# EAGLE board igep-lcd (EAGLE 6.1)
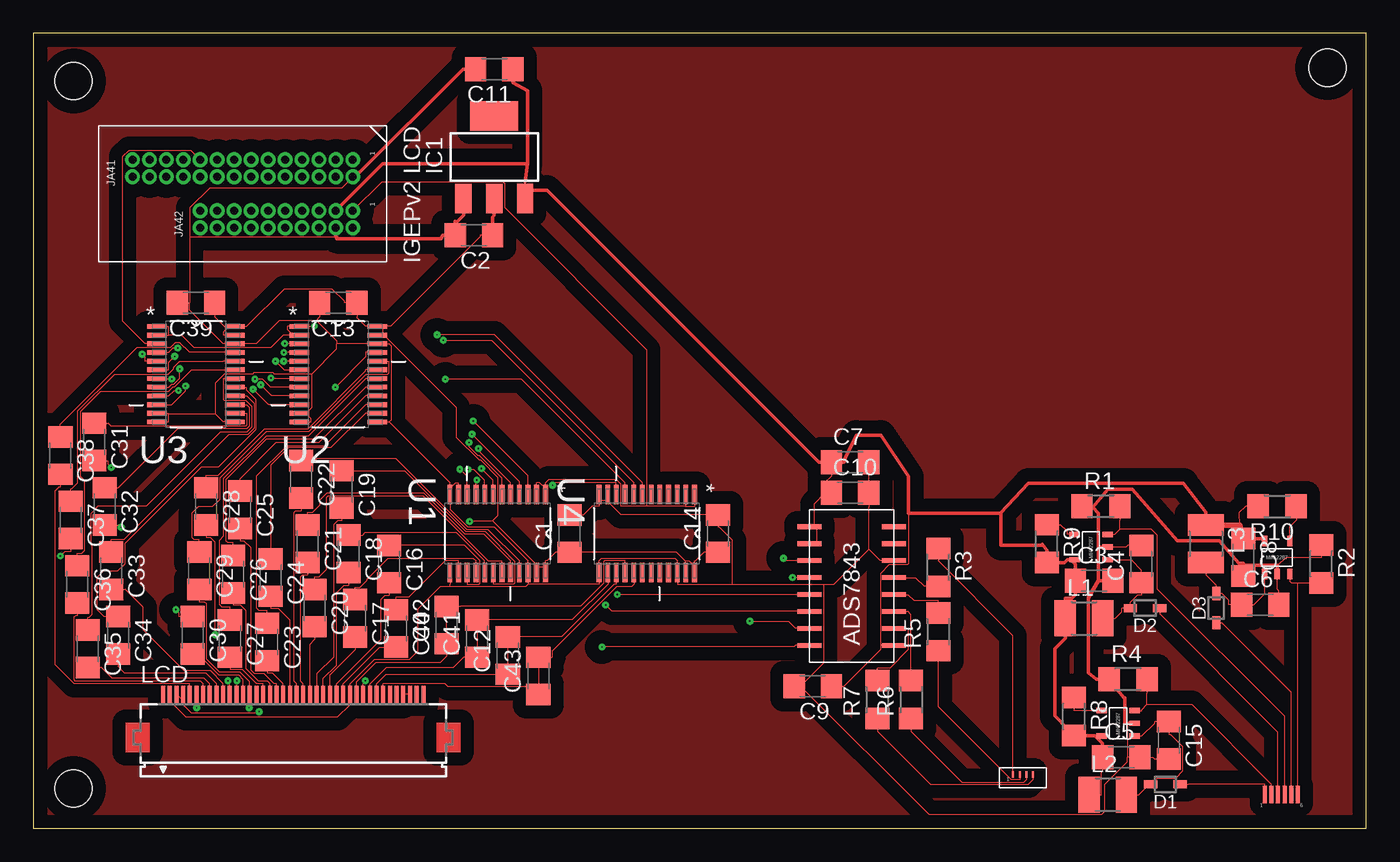
[diagram p0: board, top side]
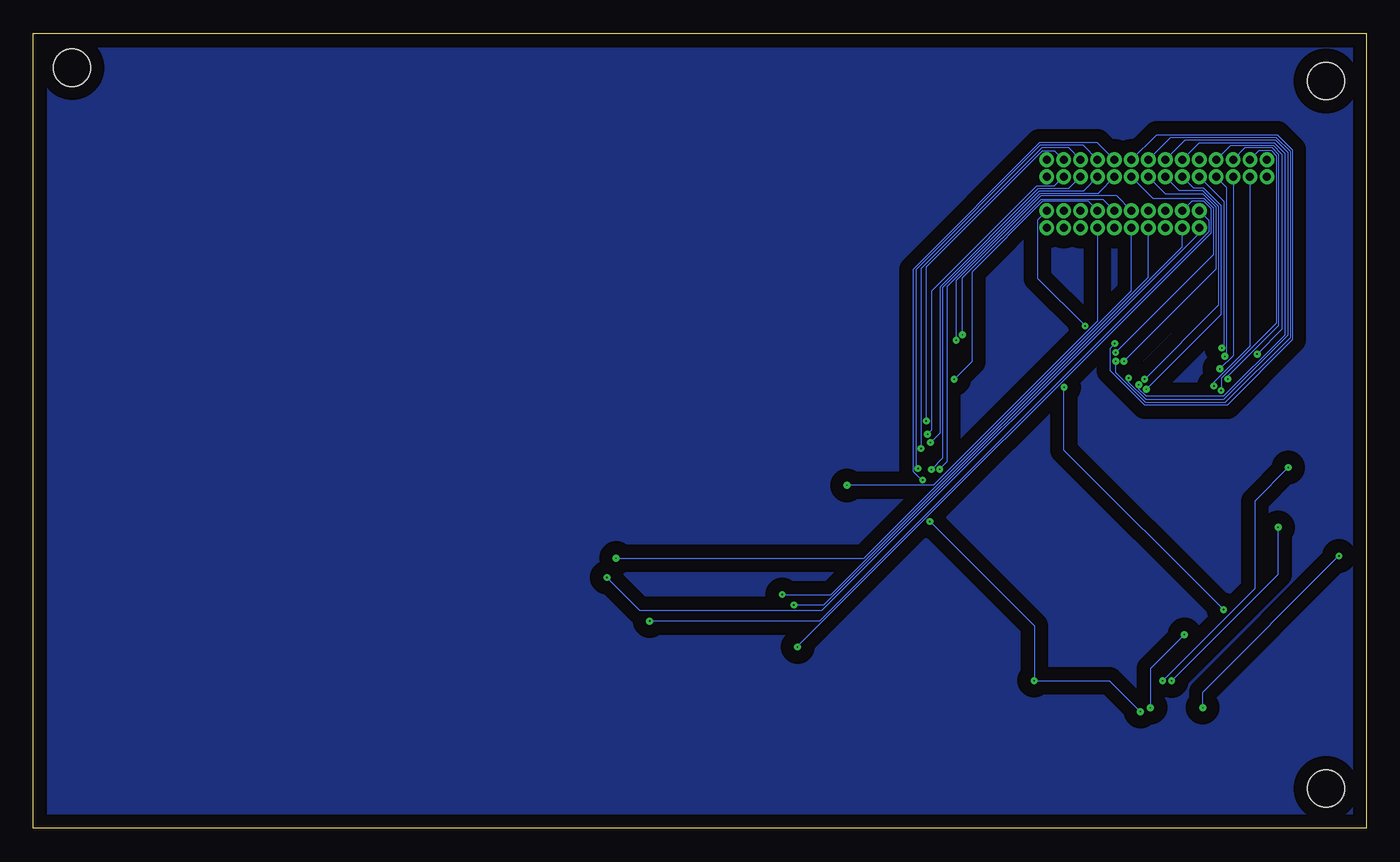
[diagram p1: board, bottom side, seen from below]

Size 99.89 x 59.57 mm. Coordinates in mm from the lower left corner, seen from the top.
Outline: 0,0 99.89,0 99.89,59.57 0,59.57 0,0
Copper layers (1*16): Top 0.035mm / dielectric 1.5mm / Bottom 0.035mm
Design rules: minimum track width 3mil, minimum drill 4mil, track to track 4mil, track to pad 4mil, pad to pad 4mil, via to via 4mil, smd to smd 4mil, copper to edge 40mil, drill to drill 4mil, minimum pad ring 10mil, minimum via ring 8mil, stop-mask expansion 4mil, vias tented up to drill 0mil, thermal gap 10mil
Holes 2.8 mm at 97,57 3,3 3,56

## Footprints (pad centres in the part's own frame; a part is rotated, then mirrored left to right if it is on the bottom)
C1206 = smd 1.6 x 1.8: 1 -1.4,0; 2 1.4,0
SOD323 = smd 1 x 0.6: 1 -1.1,0; 2 1.1,0
SOT223 = smd 1.219 x 2.235: 1 -2.311,-3.099; 2 0,-3.099; 3 2.311,-3.099 | smd 3.6 x 2.2: TAB 0,3.099
R1210 = smd 1.6 x 2.7: 1 -1.4,0; 2 1.4,0
FH12-40S-0.5SH = smd 0.3 x 1.3: 1 -9.75,3.25; 2 -9.25,3.25; 3 -8.75,3.25; 4 -8.25,3.25; 5 -7.75,3.25; 6 -7.25,3.25; 7 -6.75,3.25; 8 -6.25,3.25; 9 -5.75,3.25; 10 -5.25,3.25; 11 -4.75,3.25; 12 -4.25,3.25; 13 -3.75,3.25; 14 -3.25,3.25; 15 -2.75,3.25; 16 -2.25,3.25; 17 -1.75,3.25; 18 -1.25,3.25; 19 -0.75,3.25; 20 -0.25,3.25; 21 0.25,3.25; 22 0.75,3.25; 23 1.25,3.25; 24 1.75,3.25; 25 2.25,3.25; 26 2.75,3.25; 27 3.25,3.25; 28 3.75,3.25; 29 4.25,3.25; 30 4.75,3.25; 31 5.25,3.25; 32 5.75,3.25; 33 6.25,3.25; 34 6.75,3.25; 35 7.25,3.25; 36 7.75,3.25; 37 8.25,3.25; 38 8.75,3.25; 39 9.25,3.25; 40 9.75,3.25
R1206 = smd 1.6 x 1.803: 1 -1.422,0; 2 1.422,0
SOP65P640X120-24N = smd 1.473 x 0.356: 1 -2.921,3.581; 2 -2.921,2.921; 3 -2.921,2.286; 4 -2.921,1.626; 5 -2.921,0.965; 6 -2.921,0.33; 7 -2.921,-0.33; 8 -2.921,-0.965; 9 -2.921,-1.626; 10 -2.921,-2.286; 11 -2.921,-2.921; 12 -2.921,-3.581; 13 2.921,-3.581; 14 2.921,-2.921; 15 2.921,-2.286; 16 2.921,-1.626; 17 2.921,-0.965; 18 2.921,-0.33; 19 2.921,0.33; 20 2.921,0.965; 21 2.921,1.626; 22 2.921,2.286; 23 2.921,2.921; 24 2.921,3.581
IGEP_LCD = drill 0.6: 3V3 -2.54,5.08; ACBIAS 1.27,0; D0 -2.54,3.81; D1 -1.27,3.81; D2 -2.54,2.54; D3 -1.27,2.54; D4 -2.54,1.27; D5 -1.27,1.27; D6 -2.54,0; D7 -1.27,0; D8 -2.54,-1.27; D9 -1.27,-1.27; D10 -2.54,-2.54; D11 -1.27,-2.54; D12 -2.54,-3.81; D13 -1.27,-3.81; D14 -2.54,-5.08; D15 -1.27,-5.08; D16 -2.54,-6.35; D17 -1.27,-6.35; D18 -2.54,-7.62; D19 -1.27,-7.62; D20 -2.54,-8.89; D21 -1.27,-8.89; D22 -2.54,-10.16; D23 -1.27,-10.16; DC_5V 1.27,3.81; GND1 -1.27,5.08; GND2 2.54,3.81; HSYNC 2.54,1.27; I2C3_SCL -2.54,-11.43; I2C3_SDA -1.27,-11.43; LCD_INI 2.54,-3.81; LCD_RESB 1.27,-3.81; MCSPI1_CLK 1.27,-5.08; MCSPI1_CS0 1.27,-6.35; MCSPI1_SIMO 2.54,-5.08; MCSPI1_SOMI 2.54,-6.35; PCLK 1.27,-1.27; PUP 2.54,0; QVGA/NVGA 1.27,-2.54; SYS_BOOT0 1.27,2.54; SYS_BOOT1 2.54,2.54; SYS_BOOT5 2.54,5.08; TS_ENVVDD 2.54,-2.54; TS_NPEN_IRQ 2.54,-1.27; VIO_1V8 1.27,5.08; VSYNC 1.27,1.27
MIC2287 = smd 0.4 x 0.8: EN -0.7,-1.98; FB -0.7,0.5; GND 0.25,0.5; SW 1.2,0.5; VIN 1.2,-1.98
LCD_BL = smd 0.3 x 1.3: VLED_A1 -1.54,0; VLED_A2 -0.54,0; VLED_A3 0.46,0; VLED_C1 -1.04,0; VLED_C2 -0.04,0; VLED_C3 0.96,0
ADS7843 = smd 0.35 x 1.8: P1 -3.81,-3.81; P2 -2.54,-3.81; P3 -1.27,-3.81; P4 0,-3.81; P5 1.27,-3.81; P6 2.54,-3.81; P7 3.81,-3.81; P8 5.08,-3.81; P9 5.08,2.54; P10 3.81,2.54; P11 2.54,2.54; P12 1.27,2.54; P13 0,2.54; P14 -1.27,2.54; P15 -2.54,2.54; P16 -3.81,2.54
TS_CON = smd 0.15 x 0.5: TS1 -1,0.5; TS2 -0.5,0.5; TS3 0,0.5; TS4 0.5,0.5

## Placement (x,y rotation side)
C1  100nF  [C1206]  40.18,22.1 90 top
C2  22uF  [C1206]  33.02,44.45 180 top
C3  1uF  [C1206]  79.5,18.54 0 top
C4  0.22uF  [C1206]  83.06,19.81 90 top
C5  1uF  [C1206]  81.53,5.33 0 top
C6  0.22uF  [C1206]  91.95,16.76 0 top
C7  10uF  [C1206]  61.21,27.43 0 top
C8  1uF  [C1206]  90.68,20.32 270 top
C9  0.1uF  [C1206]  58.42,10.67 180 top
C10  0.1uF  [C1206]  61.21,25.15 0 top
C11  10uF  [C1206]  34.54,56.9 180 top
C12  100nF  [C1206]  35.56,12.95 90 top
C13  100nF  [C1206]  22.86,39.37 180 top
C14  100nF  [C1206]  51.31,22.1 90 top
C15  0.22uF  [C1206]  85.09,6.6 270 top
C16  100nF  [C1206]  26.67,19.81 270 top
C17  100nF  [C1206]  24.13,15.75 270 top
C18  100nF  [C1206]  23.62,20.57 270 top
C19  100nF  [C1206]  23.11,25.4 270 top
C20  100nF  [C1206]  21.08,16.51 270 top
C21  100nF  [C1206]  20.57,21.34 270 top
C22  100nF  [C1206]  20.07,26.16 270 top
C23  100nF  [C1206]  17.53,13.97 270 top
C24  100nF  [C1206]  17.78,18.8 270 top
C25  100nF  [C1206]  15.49,23.88 270 top
C26  100nF  [C1206]  14.99,19.05 270 top
C27  100nF  [C1206]  14.73,14.22 270 top
C28  100nF  [C1206]  12.95,24.13 270 top
C29  100nF  [C1206]  12.45,19.3 270 top
C30  100nF  [C1206]  11.94,14.48 270 top
C31  100nF  [C1206]  4.57,28.96 270 top
C32  100nF  [C1206]  5.33,24.13 270 top
C33  100nF  [C1206]  5.84,19.3 270 top
C34  100nF  [C1206]  6.35,14.48 270 top
C35  100nF  [C1206]  4.06,13.46 270 top
C36  100nF  [C1206]  3.3,18.29 270 top
C37  100nF  [C1206]  2.79,23.11 270 top
C38  100nF  [C1206]  2.03,27.94 270 top
C39  100nF  [C1206]  12.19,39.37 180 top
C40  100nF  [C1206]  27.18,14.99 270 top
C41  100nF  [C1206]  33.27,14.22 90 top
C42  100nF  [C1206]  30.99,15.24 90 top
C43  100nF  [C1206]  37.85,11.43 90 top
D1  CMDSH-3  [SOD323]  84.84,3.3 180 top
D2  CMDSH-3  [SOD323]  83.31,16.51 180 top
D3  CMDSH-3  [SOD323]  88.65,16.51 90 top
IC1  LM1117IMPX-3.3  [SOT223]  34.54,50.29 0 top
L1  10uH  [R1210]  78.74,15.75 0 top
L2  10uH  [R1210]  80.52,2.54 0 top
L3  10uH  [R1210]  87.88,21.34 270 top
LCD  FH12-40S-0.5SH  [FH12-40S-0.5SH]  19.48,6.81 0 top
R1  5.1  [R1206]  80.01,24.13 0 top
R2  5.1  [R1206]  96.52,19.81 270 top
R3  0  [R1206]  67.82,19.56 270 top
R4  5.1  [R1206]  82.04,11.18 0 top
R5  0  [R1206]  67.82,14.73 90 top
R6  0  [R1206]  65.79,9.65 90 top
R7  0  [R1206]  63.25,9.65 90 top
R8  0  [R1206]  77.98,8.38 270 top
R9  0  [R1206]  75.95,21.34 270 top
R10  0  [R1206]  93.22,24.13 180 top
U1  SN74LVC8T245PW  [SOP65P640X120-24N]  34.8,22.1 270 top
U2  SN74LVC8T245PW  [SOP65P640X120-24N]  22.86,34.04 0 top
U3  SN74LVC8T245PW  [SOP65P640X120-24N]  12.19,34.04 0 top
U4  SN74LVC8T245PW  [SOP65P640X120-24N]  45.97,22.1 270 top
U$1  IGEP_LCD  [IGEP_LCD]  18.86,47.55 270 top
U$2  MIC2287  [MIC2287]  82.04,8.13 270 top
U$3  MIC2287  [MIC2287]  80.01,21.34 270 top
U$4  MIC2287  [MIC2287]  93.47,19.56 180 top
U$5  LCD_BL  [LCD_BL]  93.82,2.54 0 top
U$6  ADS7843  [ADS7843]  60.71,17.53 90 top
U$7  TS_CON  [TS_CON]  74.42,3.54 0 top

## Library data of the parts
C1-C43 R1-R10 = rcl
D1-D3 = zetex; MPN: CDSOD323-T05C; OC_FARNELL: 1824860; OC_NEWARK: 79R6078
IC1 = lm1117
L1-L3 = resistor
LCD = con-hirose; MPN: FH12-40S-0.5SH(55); OC_FARNELL: 1324556; OC_NEWARK: 34M6178
U1-U4 = TI-SN74LVC8T245PW; DESCRIPTION: 8-BIT DUAL-SUPPLY BUS TRANSCEIVER WITH CONFIGURABLE VOLTAGE TRANSLATION AND 3-STATE OUTPUTS; MPN: SN74LVC8T245PW; OC_FARNELL: 1236407; OC_NEWARK: 58K6537; PACKAGE: TSSOP-24; SUPPLIER: Texas Instruments
U$1 = igep-lcd
U$2-U$4 = mic2287
U$5 = lcd-bl
U$6 = ads7843
U$7 = ts_con

## Nets
DEN: U4.7 U$1.ACBIAS
HSYNC\: U4.10 U$1.HSYNC
IGEP_LCD_DATA0: U1.3 U$1.D0
IGEP_LCD_DATA1: U1.4 U$1.D1
IGEP_LCD_DATA2: U1.5 U$1.D2
IGEP_LCD_DATA3: U1.6 U$1.D3
IGEP_LCD_DATA4: U1.7 U$1.D4
IGEP_LCD_DATA5: U1.8 U$1.D5
IGEP_LCD_DATA6: U1.9 U$1.D6
IGEP_LCD_DATA7: U1.10 U$1.D7
IGEP_LCD_DATA8: U2.3 U$1.D8
IGEP_LCD_DATA9: U2.4 U$1.D9
IGEP_LCD_DATA10: U2.5 U$1.D10
IGEP_LCD_DATA11: U2.6 U$1.D11
IGEP_LCD_DATA12: U2.7 U$1.D12
IGEP_LCD_DATA13: U2.8 U$1.D13
IGEP_LCD_DATA14: U2.9 U$1.D14
IGEP_LCD_DATA15: U2.10 U$1.D15
IGEP_LCD_DATA16: U3.3 U$1.D16
IGEP_LCD_DATA17: U3.4 U$1.D17
IGEP_LCD_DATA18: U3.5 U$1.D18
IGEP_LCD_DATA19: U3.6 U$1.D19
IGEP_LCD_DATA20: U3.7 U$1.D20
IGEP_LCD_DATA21: U3.8 U$1.D21
IGEP_LCD_DATA22: U3.9 U$1.D22
IGEP_LCD_DATA23: U3.10 U$1.D23
LCD_DATA0: C22.2 LCD.21
LCD_DATA1: C21.2 LCD.22
LCD_DATA2: C20.2 LCD.23
LCD_DATA3: C19.2 LCD.24
LCD_DATA4: C18.2 LCD.25
LCD_DATA5: C17.2 LCD.26
LCD_DATA6: C16.2 LCD.27
LCD_DATA7: C40.2 LCD.28
LCD_DATA8: C30.2 LCD.13
LCD_DATA9: C29.2 LCD.14
LCD_DATA10: C28.2 LCD.15
LCD_DATA11: C27.2 LCD.16
LCD_DATA12: C26.2 LCD.17
LCD_DATA13: C25.2 LCD.18
LCD_DATA14: C23.2 LCD.19
LCD_DATA15: C24.2 LCD.20
LCD_DATA16: C38.2 LCD.5
LCD_DATA17: C37.2 LCD.6
LCD_DATA18: C36.2 LCD.7
LCD_DATA19: C35.2 LCD.8
LCD_DATA20: C34.2 LCD.9
LCD_DATA21: C33.2 LCD.10
LCD_DATA22: C32.2 LCD.11
LCD_DATA23: C31.2 LCD.12
N$1: U$1.MCSPI1_CLK U$6.P16
N$2: C1.2 C2.2 C3.2 C4.2 C5.2 C6.2 C7.2 C8.2 C9.2 C10.2 C11.2 C13.2 C14.2 C15.2 C39.2 IC1.1 LCD.1 LCD.2 LCD.29 LCD.37 LCD.38 R1.1 R2.1 R4.1 U1.11 U1.12 U1.13 U1.22 U2.11 U2.12 U2.13 U2.22 U3.11 U3.12 U3.13 U3.22 U4.11 U4.12 U4.13 U4.22 U$1.GND1 U$1.GND2 U$2.GND U$3.GND U$4.GND U$6.P6
N$3: R7.1 U$7.TS4
N$4: U1.1 U1.2 U2.1 U2.2 U3.1 U3.2 U4.1 U4.2 U$1.VIO_1V8
N$5: C41.1 C41.2 LCD.32 U4.14
N$6: R6.1 U$7.TS3
N$7: U$1.MCSPI1_CS0 U$6.P15
N$8: C15.1 D1.2 L2.2 U$2.SW
N$9: C12.1 C12.2 LCD.33 U4.15
N$10: C42.1 C42.2 LCD.30 U4.16
N$11: C43.1 C43.2 LCD.34 U4.17
N$12: R5.1 U$7.TS2
N$13: D1.1 U$5.VLED_A1
N$14: R4.2 U$2.FB U$5.VLED_C1
N$15: C4.1 D2.2 L1.2 U$3.SW
N$16: D2.1 U$5.VLED_A2
N$17: R1.2 U$3.FB U$5.VLED_C2
N$18: R3.1 U$7.TS1
N$19: R10.1 U$4.EN
N$20: U$1.TS_NPEN_IRQ U$6.P11
N$21: C6.1 D3.2 L3.2 U$4.SW
N$22: D3.1 U$5.VLED_A3
N$23: R2.2 U$4.FB U$5.VLED_C3
N$24: R9.1 U$3.EN
N$25: U$1.TS_ENVVDD U$6.P13
N$26: U$1.MCSPI1_SIMO U$6.P14
N$27: U$1.MCSPI1_SOMI U$6.P12
N$28: R8.1 U$2.EN
N$29: R3.2 U$6.P5
N$30: C38.1 U3.21
N$31: R5.2 U$6.P4
N$32: C37.1 U3.20
N$33: R6.2 U$6.P3
N$34: R7.2 U$6.P2
N$35: C3.1 C5.1 C7.1 C8.1 C9.1 C10.1 C11.1 IC1.3 L1.1 L2.1 L3.1 R8.2 R9.2 R10.2 U$1.DC_5V U$2.VIN U$3.VIN U$4.VIN U$6.P1 U$6.P9 U$6.P10
N$36: C1.1 C2.1 C13.1 C14.1 C39.1 IC1.2 LCD.3 LCD.4 LCD.31 U1.23 U1.24 U2.23 U2.24 U3.23 U3.24 U4.23 U4.24
N$37: C36.1 U3.19
N$38: C35.1 U3.18
N$39: C34.1 U3.17
N$40: C33.1 U3.16
N$41: C32.1 U3.15
N$42: C31.1 U3.14
N$43: C30.1 U2.21
N$44: C29.1 U2.20
N$45: C28.1 U2.19
N$46: C27.1 U2.18
N$47: C26.1 U2.17
N$48: C25.1 U2.16
N$49: C23.1 U2.15
N$50: C24.1 U2.14
N$51: C22.1 U1.21
N$52: C21.1 U1.20
N$53: C20.1 U1.19
N$54: C19.1 U1.18
N$55: C18.1 U1.17
N$56: C17.1 U1.16
N$57: C16.1 U1.15
N$58: C40.1 U1.14
PCLK: U4.8 U$1.PCLK
VSYNC: U4.9 U$1.VSYNC

## Tracks (layer width: path | path; a pad name or v marks a point on that pad's centre or on a via)
DEN  (via drill 0.1 pad 0.51)
  Top 0.076: U4.7 45.64,25.89 34.55,36.99 v30.26,36.99
  Bottom 0.076: v30.26,36.99 30.26,41.26 24.36,47.16 19.74,47.16 U$1.ACBIAS
HSYNC\  (via drill 0.1 pad 0.51)
  Top 0.076: v38.91,25.71 39.1,25.89 43.69,25.89 U4.10
  Bottom 0.076: U$1.HSYNC 20.13,38.02 32.44,25.71 v38.91,25.71
IGEP_LCD_DATA0  (via drill 0.1 pad 0.51)
  Top 0.076: U1.3 37.08,26.41 v32.96,30.54
  Bottom 0.076: v32.96,30.54 32.96,42.09 24.26,50.79 23.37,50.79 U$1.D0
IGEP_LCD_DATA1  (via drill 0.1 pad 0.51)
  Top 0.076: U1.4 36.42,25.98 v32.87,29.53
  Bottom 0.076: U$1.D1 23.39,48.1 24.72,48.1 32.57,40.25 32.57,29.84 v32.87,29.53
IGEP_LCD_DATA2  (via drill 0.1 pad 0.51)
  Top 0.076: v33.36,28.47 33.36,28.3 35.76,25.89 U1.5
  Bottom 0.076: U$1.D2 22.3,50.99 24.31,50.99 33.36,41.94 v33.36,28.47
IGEP_LCD_DATA3  (via drill 0.1 pad 0.51)
  Top 0.076: U1.6 35.13,26.25 33.45,27.93 33.34,27.93 32.66,28.62 v32.66,28.91
  Bottom 0.076: U$1.D3 22.3,47.92 24.6,47.92 31.96,40.56 31.96,29.61 v32.66,28.91
IGEP_LCD_DATA4  (via drill 0.1 pad 0.51)
  Top 0.076: U1.7 34.47,26.08 v33.59,26.96
  Bottom 0.076: U$1.D4 21.21,51.17 24.44,51.17 33.76,41.85 33.76,27.13 v33.59,26.96
IGEP_LCD_DATA5  (via drill 0.1 pad 0.51)
  Top 0.076: U1.8 33.83,26.07 33.02,26.89 v32.58,26.89
  Bottom 0.076: U$1.D5 21.21,47.75 24.52,47.75 31.75,40.52 31.75,27.72 v32.58,26.89
IGEP_LCD_DATA6  (via drill 0.1 pad 0.51)
  Top 0.076: v33.23,26.11 33.17,26.06 33.17,25.89 U1.9
  Bottom 0.076: U$1.D6 20.15,51.38 24.48,51.38 33.98,41.88 33.98,26.78 33.32,26.11 v33.23,26.11
IGEP_LCD_DATA7  (via drill 0.1 pad 0.51)
  Top 0.076: U1.10 32.51,26.38 v31.97,26.92
  Bottom 0.076: U$1.D7 20.12,47.57 24.45,47.57 31.43,40.59 31.43,27.46 v31.97,26.92
IGEP_LCD_DATA8  (via drill 0.1 pad 0.51)
  Top 0.076: v18.84,36.33 19.06,36.33 19.06,36.32 U2.3
  Bottom 0.076: U$1.D8 15.71,51.98 6.64,51.98 5.52,50.86 5.52,36.62 10.42,31.71 16.59,31.71 19.18,34.31 19.18,35.99 v18.84,36.33
IGEP_LCD_DATA9  (via drill 0.1 pad 0.51)
  Top 0.076: U2.4 v18.77,35.66
  Bottom 0.076: v18.77,35.66 11.42,43.01 11.42,46.47 12.11,47.16 15.93,47.16 U$1.D9
IGEP_LCD_DATA10  (via drill 0.1 pad 0.51)
  Top 0.076: v18.77,35 19.06,35 U2.5
  Bottom 0.076: U$1.D10 14.62,51.8 6.77,51.8 5.7,50.73 5.7,36.77 10.58,31.89 16.52,31.89 18.77,34.15 v18.77,35
IGEP_LCD_DATA11  (via drill 0.1 pad 0.51)
  Top 0.076: v18.15,35 18.79,34.37 U2.6
  Bottom 0.076: v18.15,35 11.22,41.93 11.22,46.52 12.21,47.52 15.02,47.52 U$1.D11
IGEP_LCD_DATA12  (via drill 0.1 pad 0.51)
  Top 0.076: U2.7 17.86,33.71 v17.81,33.75
  Bottom 0.076: U$1.D12 13.54,51.6 6.83,51.6 5.88,50.65 5.88,36.94 10.69,32.12 16.49,32.12 17.81,33.44 v17.81,33.75
IGEP_LCD_DATA13  (via drill 0.1 pad 0.51)
  Top 0.076: v16.6,33.67 17.18,33.67 17.77,33.07 19.06,33.07 U2.8
  Bottom 0.076: v16.6,33.67 11.04,39.23 11.04,46.6 12.23,47.79 14.01,47.79 U$1.D13
IGEP_LCD_DATA14  (via drill 0.1 pad 0.51)
  Top 0.076: v17.04,33.24 17.88,32.41 19.06,32.41 U2.9
  Bottom 0.076: U$1.D14 12.5,51.38 6.9,51.38 6.11,50.58 6.11,36.96 10.69,32.38 16.49,32.38 17.04,32.92 v17.04,33.24
IGEP_LCD_DATA15  (via drill 0.1 pad 0.51)
  Top 0.076: U2.10 17.63,31.75 v16.47,32.91
  Bottom 0.076: v16.47,32.91 10.86,38.52 10.86,46.67 12.15,47.96 12.92,47.96 U$1.D15
IGEP_LCD_DATA16
  Top 0.076: U3.3 8.39,36.32 6.7,38.02 6.7,50.35 7.17,50.82 11.79,50.82 U$1.D16
IGEP_LCD_DATA17  (via drill 0.1 pad 0.51)
  Top 0.076: v10.82,36 10.49,36 10.15,35.66 U3.4 | v10.82,36
  Bottom 0.076: U$1.D17 10.67,46.98 10.67,36.16 v10.82,36
IGEP_LCD_DATA18  (via drill 0.1 pad 0.51)
  Top 0.076: v8.17,35.54 8.39,35.31 8.39,35 U3.5
  Bottom 0.076: U$1.D18 10.14,51.2 6.97,51.2 6.31,50.53 6.31,37.4 v8.17,35.54
IGEP_LCD_DATA19  (via drill 0.1 pad 0.51)
  Top 0.076: U3.6 10.15,34.37 10.15,34.93 v10.59,35.37
  Bottom 0.076: v10.59,35.37 10.43,35.53 10.43,48.01 U$1.D19
IGEP_LCD_DATA20  (via drill 0.1 pad 0.51)
  Top 0.076: U3.7 10.33,33.71 v10.37,33.67
  Bottom 0.076: v10.37,33.67 10.37,33.89 6.55,37.71 6.55,50.49 7.05,50.98 9.08,50.98 U$1.D20
IGEP_LCD_DATA21  (via drill 0.1 pad 0.51)
  Top 0.076: v10.97,34.43 10.97,33.72 10.53,33.28 10.35,33.28 10.15,33.07 U3.8
  Bottom 0.076: U$1.D21 9.97,35.43 v10.97,34.43
IGEP_LCD_DATA22  (via drill 0.1 pad 0.51)
  Top 0.076: v10.87,32.81 10.55,32.81 10.15,32.41 U3.9
  Bottom 0.076: U$1.D22 7.99,50.81 7.12,50.81 6.73,50.41 6.73,37.87 10.87,33.72 v10.87,32.81
IGEP_LCD_DATA23  (via drill 0.1 pad 0.51)
  Top 0.076: U3.10 10.37,31.75 11.41,32.79 v11.41,33.15
  Bottom 0.076: U$1.D23 8.7,36.15 11.41,33.44 v11.41,33.15
LCD_DATA0
  Top 0.076: C22.2 20.07,23.82 19.67,23.82 19.53,23.69 19.53,11.05 19.73,10.85 LCD.21
LCD_DATA1
  Top 0.076: C21.2 20.57,19 20.18,19 20.04,18.86 20.04,11.04 20.23,10.85 LCD.22
LCD_DATA2
  Top 0.076: C20.2 21.08,14.17 20.73,13.82 LCD.23
LCD_DATA3
  Top 0.076: LCD.24 21.23,11.57 22.49,12.84 22.49,22.75 22.8,23.06 23.11,23.06 C19.2
LCD_DATA4
  Top 0.076: C18.2 23.62,18.23 23.28,18.23 22.71,17.67 22.71,12.24 21.73,11.26 LCD.25
LCD_DATA5
  Top 0.076: LCD.26 22.23,11.51 24.13,13.41 C17.2
LCD_DATA6
  Top 0.076: C16.2 26.67,17.47 26.36,17.47 26.05,17.16 26.05,14.17 22.73,10.85 LCD.27
LCD_DATA7
  Top 0.076: LCD.28 23.23,10.85 25.97,13.59 C40.2
LCD_DATA8
  Top 0.076: LCD.13 15.73,11.15 15.42,11.46 13.94,11.46 12.33,13.08 C30.2
LCD_DATA9
  Top 0.076: C29.2 12.45,16.96 12.85,16.96 12.98,16.83 12.98,12.68 13.96,11.7 15.51,11.7 16.23,10.98 16.23,10.85 LCD.14
LCD_DATA10  (via drill 0.1 pad 0.51)
  Top 0.076: v13.62,14.52 13.62,21.46 13.29,21.79 12.95,21.79 C28.2 | v16.17,9.05 16.39,9.27 16.73,9.27 LCD.15
  Bottom 0.076: v13.62,14.52 16.17,11.97 v16.17,9.05
LCD_DATA11
  Top 0.076: C27.2 14.73,11.88 15.7,11.88 16.73,10.85 17.23,10.85 LCD.16
LCD_DATA12
  Top 0.076: C26.2 14.99,16.71 15.55,16.71 15.97,16.3 15.97,11.96 16.9,11.03 17.55,11.03 17.73,10.85 LCD.17
LCD_DATA13
  Top 0.076: C25.2 15.49,21.54 15.8,21.54 16.32,21.02 16.32,11.87 16.59,11.6 17.3,11.6 18.05,10.85 18.23,10.85 LCD.18
LCD_DATA14
  Top 0.076: LCD.19 18.73,10.85 17.95,11.63 17.53,11.63 C23.2
LCD_DATA15
  Top 0.076: C24.2 17.78,16.46 18.37,16.46 19.23,15.59 LCD.20
LCD_DATA16
  Top 0.076: C38.2 2.03,25.6 1.94,25.6 1.64,25.31 1.64,12.28 3.07,10.85 11.73,10.85 LCD.5
LCD_DATA17  (via drill 0.1 pad 0.51)
  Top 0.076: v2.04,20.42 2.4,20.77 2.79,20.77 C37.2 | LCD.6 12.23,9.27 12.25,9.25 v12.25,9.05
  Bottom 0.076: v12.25,9.05 12.25,10.21 v2.04,20.42
LCD_DATA18
  Top 0.076: C36.2 3.3,15.95 3.16,15.95 3.02,15.81 3.02,11.17 3.11,11.08 12.5,11.08 12.73,10.85 LCD.7
LCD_DATA19
  Top 0.076: C35.2 5.1,12.06 5.91,11.26 12.82,11.26 13.23,10.85 LCD.8
LCD_DATA20
  Top 0.076: C34.2 6.35,12.14 6.86,11.63 12.95,11.63 13.73,10.85 LCD.9
LCD_DATA21
  Top 0.076: C33.2 6.88,17.9 8.22,16.56 8.22,14.89 11.31,11.81 13.27,11.81 14.23,10.85 LCD.10
LCD_DATA22  (via drill 0.1 pad 0.51)
  Top 0.076: v6.59,22.56 6.43,22.73 6.37,22.73 C32.2 | v14.57,11.07 14.57,11.01 14.73,10.85 LCD.11
  Bottom 0.076: v14.57,11.07 6.59,19.05 v6.59,22.56
LCD_DATA23  (via drill 0.1 pad 0.51)
  Top 0.076: v15.26,11.07 15.26,10.88 15.23,10.85 LCD.12 | v5.83,27.05 5.61,27.27 5.61,27.56 C31.2
  Bottom 0.076: v5.83,27.05 8.36,24.52 8.36,17.96 v15.26,11.07
N$1  (via drill 0.1 pad 0.51)
  Top 0.076: v42.62,13.6 57.01,13.6 57.13,13.72 U$6.P16
  Bottom 0.076: v42.62,13.6 42.62,13.64 11.62,44.64 11.62,46.42 12.18,46.98 13.08,46.98 U$1.MCSPI1_CLK
N$2
  Top 0.076: 31.22,18.12 30.49,18.12 28.8,16.43 28.8,13.29 28.15,12.65 25.53,12.65 23.73,10.85 LCD.29 23.73,9.27 | 37.08,18.3 36.91,18.12 31.22,18.12 | 31.22,18.12 31.22,18.3 U1.13 | 37.08,18.3 42.39,18.3 U4.13 42.39,20.05 42.57,20.23 48.08,20.23 48.26,20.05 48.26,19.57 U4.22 48.26,18.3 52.39,18.3 | 11.73,44.32 11.73,39.37 | 11.73,44.32 11.73,46.49 13.22,47.98 23.1,47.98 U$1.GND1 24.13,48.82 | 11.73,44.32 22.67,44.32 | C39.2 11.73,39.37 | 11.73,39.37 11.73,38.83 14.24,36.32 U3.22 16.69,36.32 18.42,38.05 21.22,38.05 | 81.99,5.33 81.99,7.88 82,7.88 | R4.1 80.6,11.18 80.57,11.18 | 57.49,10.67 67.11,1.05 80.08,1.05 80.31,1.28 80.31,3.32 81.99,5 81.99,5.33 | 59.21,18.3 59.99,18.3 62.61,20.93 | 52.39,18.3 59.21,18.3 | 59.21,18.3 59.21,12.39 57.49,10.67 | 52.39,18.3 52.39,21.59 51.42,22.56 51.31,22.56 C14.2 44.03,23.5 43.05,24.47 43.05,24.58 | C1.2 41.22,23.5 41.87,24.14 42.39,24.14 42.39,24.58 | 37.08,18.3 U1.22 37.08,20.05 34.53,22.61 32.54,22.61 31.22,23.93 31.22,24.14 U1.12 31.22,25.46 | 21.22,38.05 22.74,36.54 22.74,36.32 | 21.22,38.05 21.22,38.09 21.46,38.33 C13.2 | 62.61,20.93 62.61,24.11 C10.2 C7.2 | 62.61,20.93 63.48,20.07 U$6.P6 | C9.2 57.49,10.67 | 20.38,31.11 20.4,31.11 20.82,30.7 20.82,30.45 U2.12 | 20.84,34.05 20.84,31.52 20.44,31.11 20.38,31.11 | 20.84,34.05 18.07,34.05 17.97,34.15 16.53,34.15 16.43,34.05 14.3,34.05 13.61,33.36 13.61,31.08 | U4.12 42.39,24.58 | U4.11 43.05,24.58 | 42.39,24.58 43.05,24.58 | 13.61,31.08 14.24,30.45 U3.13 | 10.15,31.08 13.61,31.08 | 20.84,34.05 22.74,35.94 22.74,36.32 | 22.74,36.32 24.91,36.32 25.35,36.32 U2.22 26.66,36.32 26.84,36.14 26.84,30.64 26.66,30.45
  Top 0.076: 10.23,9.55 9.95,9.27 9.73,9.27 LCD.1 | 10.23,9.55 10.23,9.66 LCD.2 | 10.23,9.55 11.43,8.36 22.82,8.36 23.73,9.27 | R2.1 96.52,20.29 93.92,20.29 93.22,19.73 | 90.68,19.73 90.68,19.6 | U$4.GND 93.22,17.93 93.35,17.8 C6.2 | 79.31,24.13 79.39,24.05 | 31.79,45.49 31.62,45.49 | R1.1 79.06,24.13 | C15.2 84.05,5.2 83.92,5.33 C5.2 82.85,5.33 81.99,5.33 | 23.73,9.27 27.73,9.27 LCD.37 LCD.38 | 10.15,31.08 10.15,31.11 U3.11 | 10.15,31.08 10.15,30.45 U3.12 | U1.11 31.88,25.89 31.64,25.89 31.22,25.47 31.22,25.46 | 31.22,25.46 31.22,25.89 26.66,30.45 | U2.11 20.38,31.11 | U2.13 26.66,30.45 | U$3.GND 81.89,21.09 82.02,21.21 C4.2
  Top 0.254: R4.1 81.74,9.79 81.79,9.78 81.79,8.13 81.79,7.88 81.99,7.88 | U$2.GND 82,7.88 | U$1.GND2 22.67,44.32 22.73,44.32 22.73,44.2 30.55,44.19 30.68,44.45 C2.2 31.62,45.49 | 80.57,11.18 79.68,11.18 79.07,11.66 79.07,17.27 79.83,18.54 | 79.83,21.21 79.83,18.54 | U$4.GND 93.22,19.73 90.68,19.73 | C8.2 90.68,19.6 90.68,19.86 90.33,19.86 88.9,21.54 85.74,21.54 82.36,25.43 80.51,25.43 79.39,24.05 79.83,23.6 79.83,21.21 | 79.06,24.13 79.31,24.13 | IC1.1 32.23,45.94 31.79,45.49 | 24.13,48.82 32.2,56.9 C11.2 | 79.83,21.21 79.97,21.09 U$3.GND | C3.2 79.83,18.54
N$3
  Top 0.076: U$7.TS4 74.92,3.65 74.56,3.29 67.24,3.29 63.25,7.29 R7.1
N$4  (via drill 0.1 pad 0.51)
  Top 0.076: 10.15,36.96 11.1,36.96 12.05,36 17.78,36 18.73,36.96 19.06,36.96 19.5,36.96 | U1.2 37.72,25.89 37.96,25.89 38.38,25.47 38.38,25.46 | 38.38,25.46 38.38,25.89 38.6,26.11 43.72,26.11 44.03,25.8 44.03,24.16 44.05,24.14 45.97,24.14 | U1.1 38.38,25.46 | U$1.VIO_1V8 26.12,48.47 35.2,48.47 35.32,48.34 35.32,46.53 45.97,35.87 45.97,24.14 | 48.9,24.14 45.97,24.14 | v21.06,37.65 20.85,37.65 20.82,37.62 U2.1 19.06,37.62 19.06,37.38 19.48,36.96 19.5,36.96 | U2.2 19.5,36.96 | 48.9,24.14 48.9,24.19 U4.2 | U4.1 49.55,24.14 48.9,24.14 | 10.15,36.96 10.15,37.62 U3.1 | U3.2 10.15,36.96
  Bottom 0.076: U$1.VIO_1V8 24.64,45.59 24.64,41.23 v21.06,37.65
N$5
  Top 0.076: U4.14 43.05,18.3 40.38,15.62 C41.2 C41.1 32.23,12.82 31.5,12.09 26.47,12.09 25.23,10.85 LCD.32
N$6
  Top 0.076: U$7.TS3 74.42,3.65 74.24,3.47 69.6,3.47 65.79,7.29 R6.1
N$7  (via drill 0.1 pad 0.51)
  Top 0.076: U$6.P15 57.13,14.99 56.58,15.53 v53.7,15.53
  Bottom 0.076: U$1.MCSPI1_CS0 11.8,45.57 11.8,44.71 40.98,15.53 v53.7,15.53
N$8
  Top 0.076: D1.2 83.74,3.28 | 83.74,3.28 83.6,3.28 82.86,2.54 L2.2 | 83.74,3.28 84.19,3.74 85.59,3.74 86.13,4.28 86.13,6.14 85.21,7.06 85.09,7.06 C15.1 84.05,8 84.05,7.9 83.08,6.93 U$2.SW
N$9
  Top 0.076: U4.15 43.69,18.3 43.52,18.3 39.57,14.35 C12.2 C12.1 26.43,11.55 25.73,10.85 LCD.33
N$10
  Top 0.076: 30.54,12.45 25.69,12.45 24.23,10.98 24.23,10.85 LCD.30 | 30.54,12.45 | 30.54,12.45 30.99,12.9 C42.1 C42.2 32.03,16.64 40.99,16.64 42.73,18.38 42.73,19.97 42.82,20.05 44.35,20.05 U4.16
N$11
  Top 0.076: U4.17 45.01,18.3 44.83,18.12 43.72,18.12 38.89,13.29 38.89,12.83 C43.2 37.85,10.6 | 37.85,10.6 C43.1 | 37.85,10.6 31.09,10.6 30.85,10.85 26.23,10.85 LCD.34
N$12
  Top 0.076: U$7.TS2 73.92,3.65 73.29,3.65 67.82,9.12 R5.1
N$13
  Top 0.076: D1.1 86.58,3.3 86.6,3.33 92.28,3.33 U$5.VLED_A1
N$14
  Top 0.076: 83.46,9.29 86.82,9.29 92.78,3.33 U$5.VLED_C1 | 83.46,9.29 83.08,8.91 83.08,8.83 U$2.FB | 83.46,9.29 83.46,10.13 R4.2
N$15
  Top 0.076: U$3.SW 82.27,20.14 83.06,19.35 C4.1 83.06,17.47 82.73,17.47 82.21,16.95 D2.2 81.57,16.51 81.57,16.24 81.08,15.75 L1.2
N$16
  Top 0.076: D2.1 84.41,16.07 93.28,7.2 U$5.VLED_A2
N$17
  Top 0.076: 81.43,22.42 81.43,23.09 R1.2 | 81.43,22.42 81.05,22.04 U$3.FB | U$5.VLED_C2 93.78,8.41 84.25,17.94 84.25,21.97 83.79,22.42 81.43,22.42
N$18
  Top 0.076: R3.1 67.82,20.04 73.42,14.44 U$7.TS1
N$19
  Top 0.076: R10.1 94.64,23.09 94.17,22.62 U$4.EN
N$20  (via drill 0.1 pad 0.51)
  Top 0.076: U$6.P11 56.4,20.07 v56.22,20.25
  Bottom 0.076: v56.22,20.25 37.62,20.25 17.59,40.28 U$1.TS_NPEN_IRQ
N$21
  Top 0.076: U$4.SW 92.27,17.55 91.49,16.76 C6.1 89.61,16.76 89.61,17.09 89.09,17.61 D3.2 88.65,18.25 88.63,18.25 87.88,19 L3.2
N$22
  Top 0.076: D3.1 89.09,15.41 94.28,10.22 U$5.VLED_A3
N$23
  Top 0.076: 94.78,18.39 94.3,18.39 94.17,18.52 U$4.FB | 94.78,18.39 96.1,18.39 R2.2 | 94.78,18.39 94.78,3.33 U$5.VLED_C3
N$24
  Top 0.076: U$3.EN 77.49,22.04 77.49,22.25 76.99,22.76 R9.1
N$25  (via drill 0.1 pad 0.51)
  Top 0.076: U$6.P13 v43.77,17.53
  Bottom 0.076: v43.77,17.53 40.1,17.53 16.32,41.3 U$1.TS_ENVVDD
N$26  (via drill 0.1 pad 0.51)
  Top 0.076: U$6.P14 43.38,16.26 v42.89,16.74
  Bottom 0.076: v42.89,16.74 40.63,16.74 13.78,43.59 U$1.MCSPI1_SIMO
N$27  (via drill 0.1 pad 0.51)
  Top 0.076: v56.9,18.8 57.13,18.8 U$6.P12
  Bottom 0.076: v56.9,18.8 54.46,16.35 40.77,16.35 12.51,44.61 U$1.MCSPI1_SOMI
N$28
  Top 0.076: R8.1 77.98,8.86 78.01,8.83 U$2.EN
N$29
  Top 0.076: R3.2 66.78,18.14 66.12,18.8 U$6.P5
N$30
  Top 0.076: C38.1 2.03,30.28 7.76,36 10.24,36 10.63,36.4 10.98,36.4 11.72,35.66 U3.21
N$31
  Top 0.076: U$6.P4 65.56,17.53 65.99,17.09 67.82,17.09 R5.2
N$32
  Top 0.076: U3.20 14.24,35 10.96,35 10.5,34.54 10.5,34.46 10.09,34.05 6.08,34.05 3.33,31.29 3.33,25.9 2.88,25.45 2.79,25.45 C37.1
N$33
  Top 0.076: R6.2 65.79,12.01 65.79,16.03 65.56,16.26 U$6.P3
N$34
  Top 0.076: R7.2 63.25,12.01 64.19,12.01 65.56,13.38 65.56,14.99 U$6.P2
N$35
  Top 0.076: 65.6,23.63 65.6,19.84 65.52,19.75 64.14,19.75 63.48,19.09 63.48,13.72 | 60.75,27.43 60.75,27.55 | 63.48,13.72 | 63.48,13.72 63.48,13.38 60.76,10.67 C9.1 | U$6.P1 63.48,13.72 | 58.49,22.61 58.69,22.41 58.69,21.34 U$6.P10 | 59.34,25.15 58.49,24.29 58.49,22.61 | 59.34,25.15 59.34,25.92 59.81,26.39 C7.1 | 58.49,22.61 58.43,22.61 U$6.P9 | 72.47,23.63 72.52,23.63 | 90.43,22.73 90.4,23.68 90.86,24.13 R10.2 | R9.2 76.21,19.91 76.47,19.91 | 80.11,6.37 80.13,6.37 | 79.05,6.93 79.02,6.96 | U$2.VIN 79.56,6.93 | 77.34,15.47 L1.1 | U$3.VIN 77.76,20.14 | C10.1 59.34,25.15 | 36.85,48.45 36.85,47.82 IC1.3 | 78.5,6.96 R8.2 | C5.1 80.13,4.29 80.06,4.22 80.06,2.54 L2.1
  Top 0.254: 60.75,27.55 61.68,29.47 63.52,29.47 65.6,26.39 65.6,23.63 72.47,23.63 74.59,25.88 86.19,25.88 87.88,23.68 L3.1 | 37.02,49.79 37.02,55.29 35.94,55.86 C11.1 | 36.85,48.45 37.02,49.79 | 37.02,49.79 26.18,49.79 U$1.DC_5V | 72.52,23.63 72.52,21.21 75.56,21.21 75.61,21.31 75.95,20.85 R9.2 | 60.75,27.43 C7.1 58.87,27.43 38.48,47.82 36.85,47.82 | C5.1 80.13,6.37 | 80.11,6.37 79.56,6.93 79.05,6.93 | L1.1 77.34,17.24 77.84,17.24 78.1,17.5 C3.1 78.1,19.79 77.76,20.14 77.49,20.14 77.27,19.91 76.47,19.91 | 77.34,15.47 77.34,14.26 76.56,13.47 76.56,8.43 76.71,8.28 R8.2 | 78.5,6.96 79.02,6.96 | C8.1 92.27,21.72 U$4.VIN
  Top 0.406: L3.1 89,22.73 89.03,22.73 89.03,22.74 89.37,22.74 90.43,22.73 | 90.43,22.73 C8.1
N$36  (via drill 0.1 pad 0.51)
  Top 0.076: 49.55,19.61 49.16,20.01 48.9,20.01 | 48.9,20.01 48.21,20.7 C1.1 39.14,20.7 38.5,20.05 38.38,20.05 38.38,19.61 | U4.23 48.9,20.01 | 49.55,19.61 49.55,20.05 49.62,20.05 50.27,20.7 C14.1 | U4.24 49.55,19.61 | 14.48,37.44 14.24,37.2 14.24,36.96 U3.23 | 14.48,37.44 14.66,37.62 14.68,37.62 U3.24 15.99,37.62 18.79,40.41 22.39,40.41 23.32,39.49 23.32,39.37 C13.1 24.26,38.85 24.26,38.33 24.26,38.26 24.91,37.62 U2.24 26.22,37.62 | 14.48,37.44 13.59,38.33 C39.1 | 34.41,23.06 34.35,23 v32.7,23 | 26.22,36.96 26.3,36.96 31.7,31.57 31.7,29.32 33.4,27.62 33.5,27.62 34.78,26.33 34.78,23.44 34.41,23.06 | 37.72,19.61 37.72,19.74 34.41,23.06 | 37.72,19.61 38.38,19.61 | U1.23 37.72,19.61 | U1.24 38.38,19.61 | C2.1 33.48,44.45 33.48,44.33 26.77,37.62 26.22,37.62 | 34.54,45.94 34.42,45.81 | 26.22,36.96 26.22,37.62 | U2.23 26.22,36.96 | 11.23,9.66 11.12,9.66 LCD.3 | 11.23,9.66 11.23,9.27 11.87,8.63 16.8,8.63 v16.92,8.75 | LCD.4 11.23,9.66 | v24.88,11.07 24.88,11 24.73,10.85 LCD.31
  Top 0.254: 34.42,45.81 C2.1 | IC1.2 34.54,45.94
  Bottom 0.076: v32.7,23 24.88,15.19 v24.88,11.07 19.24,11.07 v16.92,8.75
N$37
  Top 0.076: U3.19 11.87,34.37 10.6,33.1 10.49,33.1 10.14,32.75 5.04,32.75 3.53,31.25 3.53,26.34 3.84,26.03 3.84,20.86 3.61,20.63 3.3,20.63 C36.1
N$38
  Top 0.076: C35.1 4.06,15.8 4.14,15.8 4.36,16.02 4.36,21.21 4.29,21.27 4.29,23.59 4.83,24.13 8.45,24.13 14.01,29.69 15.98,29.69 16.36,30.07 16.36,31.64 15.9,32.09 14.32,32.09 14.24,32.17 14.24,33.71 U3.18
N$39
  Top 0.076: C34.1 5.31,15.88 4.8,16.39 4.8,18.82 5.28,19.3 6.34,19.3 6.88,19.85 6.88,21.37 12.6,27.09 13.88,27.09 16.71,29.92 16.71,32.11 15.99,32.84 15.99,33.07 U3.17
N$40
  Top 0.076: C33.1 5.84,21.64 6.78,21.64 14.65,29.51 16.05,29.51 16.54,30 16.54,31.86 15.99,32.41 U3.16
N$41
  Top 0.076: C32.1 6.37,25.53 10.8,29.96 15.99,29.96 16.18,30.14 16.18,31.56 15.99,31.75 U3.15
N$42
  Top 0.076: U3.14 15.99,31.11 15.99,30.21 15.92,30.14 5.83,30.14 5.61,30.36 C31.1
N$43  (via drill 0.1 pad 0.51)
  Top 0.076: v22.64,33.06 24.91,35.32 24.91,35.66 U2.21 | v10.68,16.39 10.9,16.17 10.9,15.88 C30.1
  Bottom 0.076: v10.68,16.39 22.64,28.35 v22.64,33.06
N$44
  Top 0.076: C29.1 12.45,21.64 12.05,21.64 11.91,21.78 11.91,23.65 12.39,24.13 13.45,24.13 13.99,24.67 13.99,26.27 17.48,29.76 20.66,29.76 24.94,34.03 26.57,34.03 26.66,34.13 26.66,35 U2.20
N$45
  Top 0.076: U2.19 24.91,34.37 24.91,34.29 20.58,29.96 17.33,29.96 13.84,26.47 12.95,26.47 C28.1
N$46
  Top 0.076: C27.1 14.73,16.56 14.14,16.56 13.95,16.76 13.95,21.61 14.28,21.94 14.28,26.23 17.47,29.43 20.63,29.43 24.91,33.71 U2.18
N$47
  Top 0.076: C26.1 14.99,21.39 14.59,21.39 14.45,21.52 14.45,26.15 17.49,29.18 21.02,29.18 24.91,33.07 U2.17
N$48
  Top 0.076: U2.16 24.91,32.41 21.41,28.92 18.2,28.92 15.49,26.22 C25.1
N$49
  Top 0.076: U2.15 24.91,31.75 21.84,28.68 19.01,28.68 16.74,26.41 16.74,16.51 16.94,16.31 17.53,16.31 C23.1
N$50
  Top 0.076: U2.14 24.91,31.11 22.3,28.51 19.09,28.51 17.78,27.2 C24.1
N$51
  Top 0.076: C22.1 21.11,27.56 21.28,27.74 27.15,27.74 32.46,22.43 34.05,22.43 36.42,20.05 U1.21
N$52
  Top 0.076: C21.1 20.57,23.68 20.91,23.68 21.48,24.24 21.48,24.61 22.02,25.15 29.24,25.15 32.32,22.07 33.74,22.07 35.76,20.05 U1.20
N$53
  Top 0.076: U1.19 35.13,20.05 34.09,20.05 29.2,24.94 22.1,24.94 21.99,24.83 21.99,19.42 21.42,18.85 21.08,18.85 C20.1
N$54
  Top 0.076: C19.1 27.84,26.8 32.39,22.25 33.85,22.25 36.08,20.02 36.08,18.38 36,18.3 34.47,18.3 U1.18
N$55
  Top 0.076: C18.1 24.66,21.97 24.84,22.15 31.73,22.15 33.83,20.05 U1.17
N$56
  Top 0.076: C17.1 24.13,18.09 24.48,18.09 25,18.61 25,18.68 26.57,20.25 32.98,20.25 33.17,20.05 U1.16
N$57
  Top 0.076: U1.15 32.51,18.3 33.41,18.3 33.49,18.38 33.49,20.05 32.33,21.21 C16.1
N$58
  Top 0.076: C40.1 27.18,17.33 28.12,17.33 30.84,20.05 31.88,20.05 U1.14
N$59
  pour Top (isolate 1): 1,59 99,59 99,1 1,1
N$60
  pour Bottom (isolate 1): 1,59 99,59 99,1 1,1
PCLK  (via drill 0.1 pad 0.51)
  Top 0.076: v30.73,36.58 34.33,36.58 45.01,25.89 U4.8
  Bottom 0.076: U$1.PCLK 18.7,47.39 24.38,47.39 30.73,41.03 v30.73,36.58
VSYNC  (via drill 0.1 pad 0.51)
  Top 0.076: U4.9 44.35,25.89 36.58,33.66 v30.87,33.66
  Bottom 0.076: U$1.VSYNC 20.83,46.98 24.25,46.98 29.56,41.67 29.56,34.97 v30.87,33.66